# Altium PCB DataCollectionV1.0（18-7-31）.PcbDoc (part 1 of 2)
Units mm, origin at the board's own origin, x right, y up, seen from the top; angles counter-clockwise.
Board outline 100 x 91.53 mm, 4 copper layers (Top Layer, GND, VCC, Bottom Layer); 127 components, 107 nets, 701 pads, 38 vias.
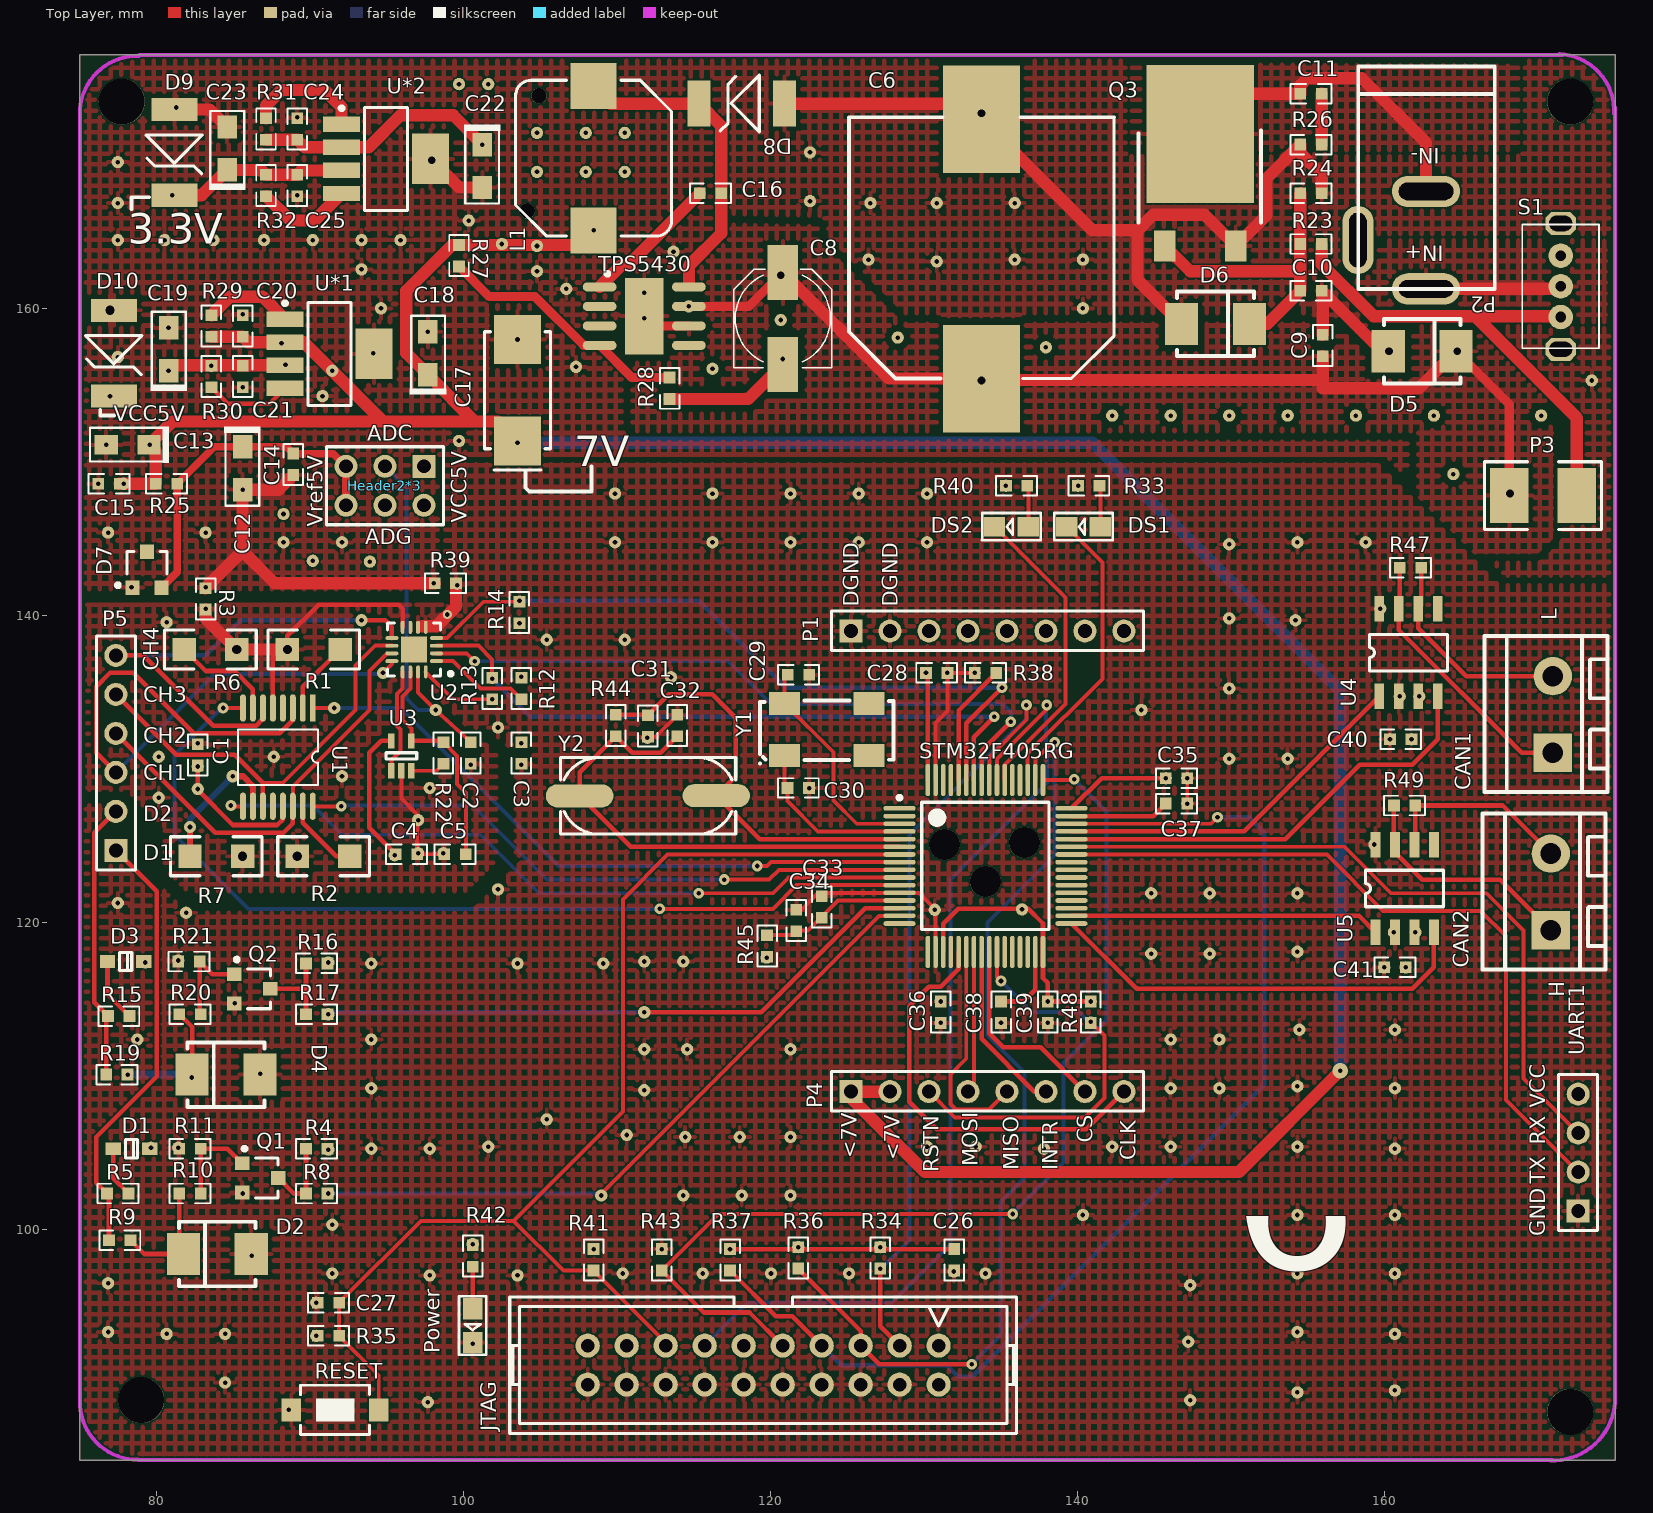
[diagram p0: Top Layer view]
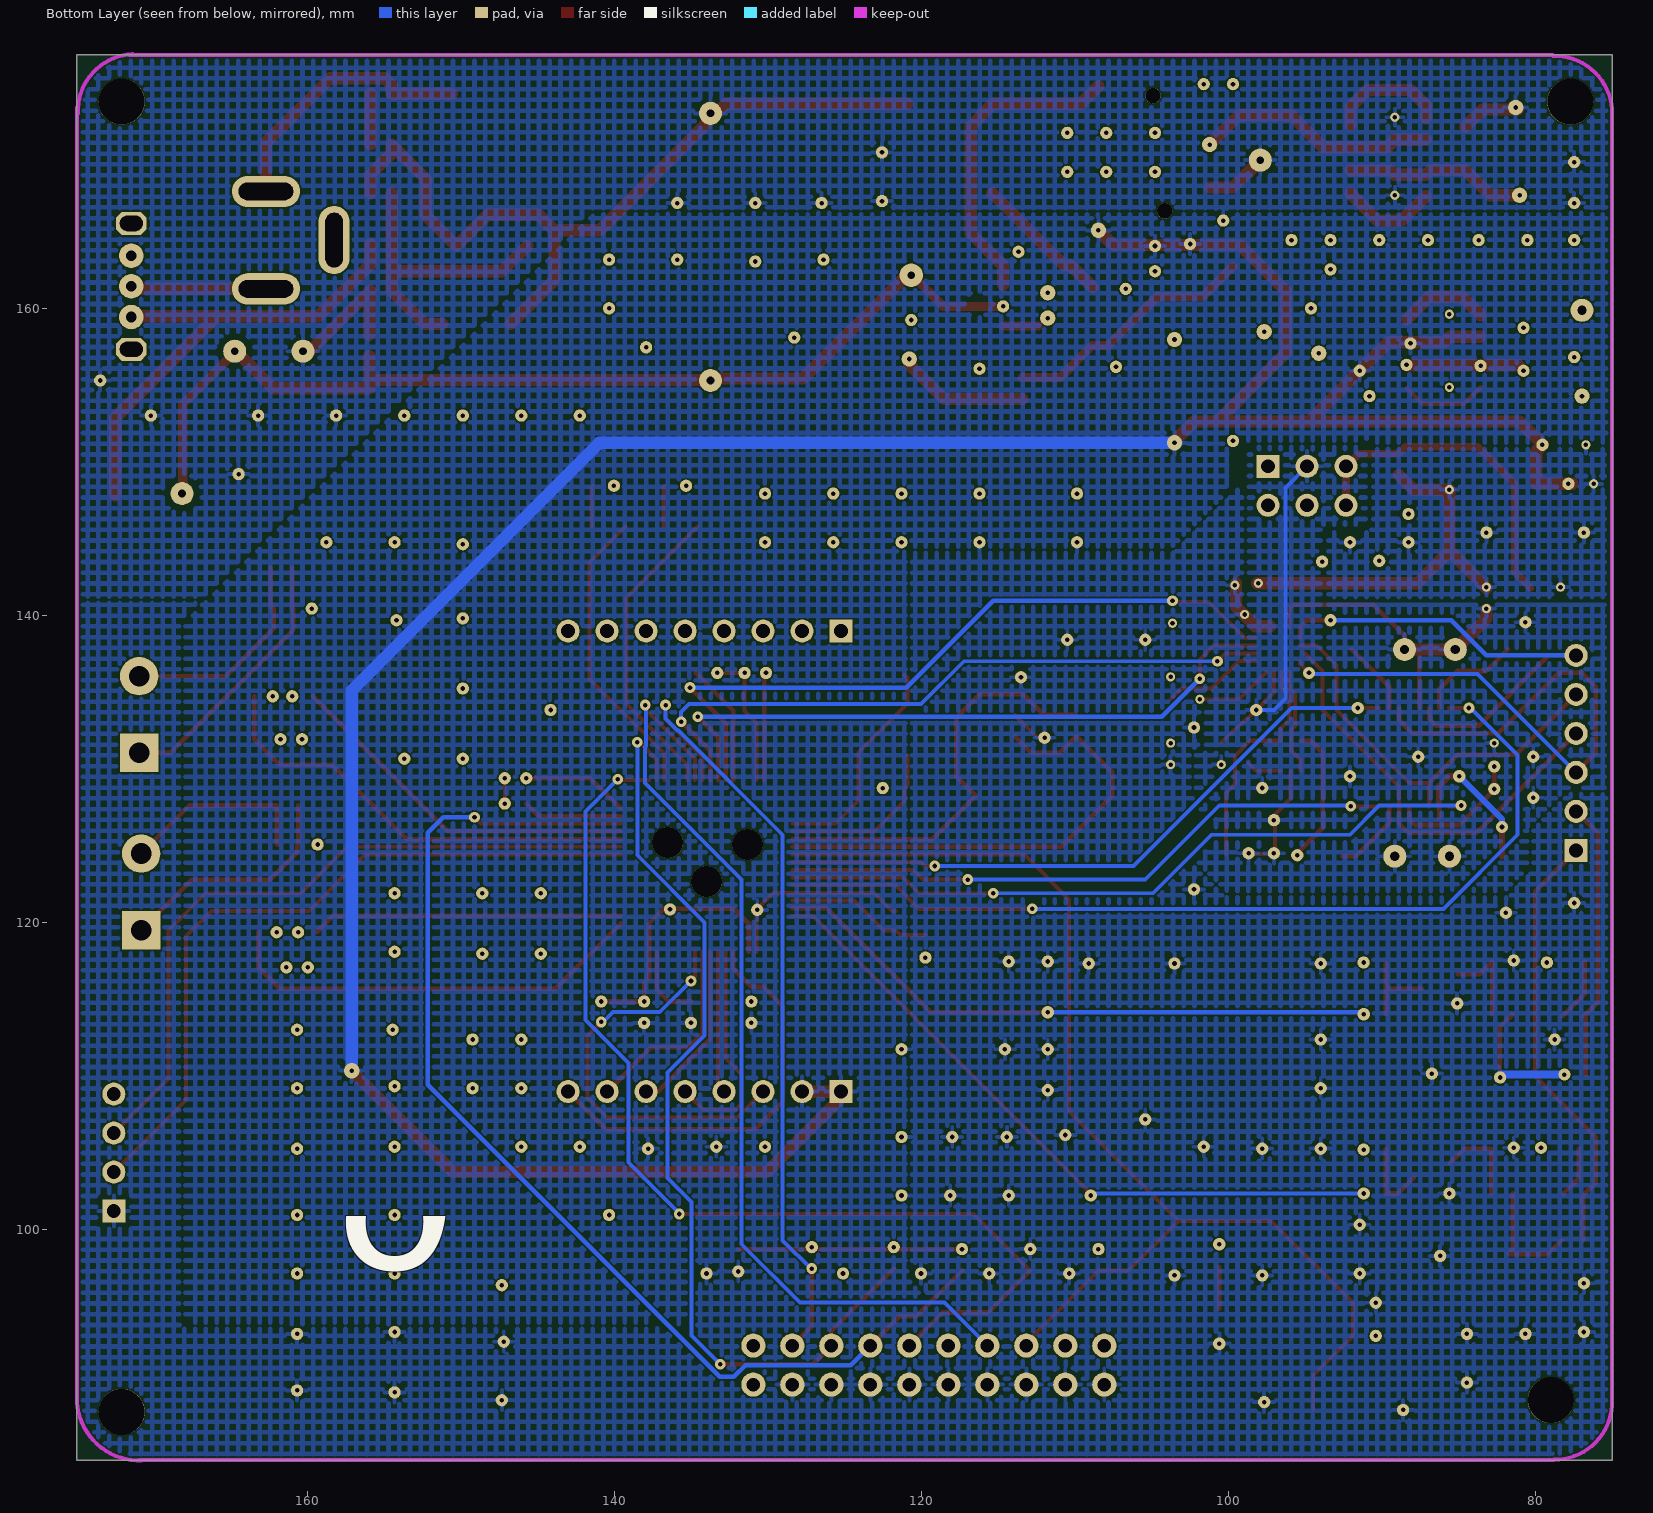
[diagram p1: Bottom Layer view, seen from below]
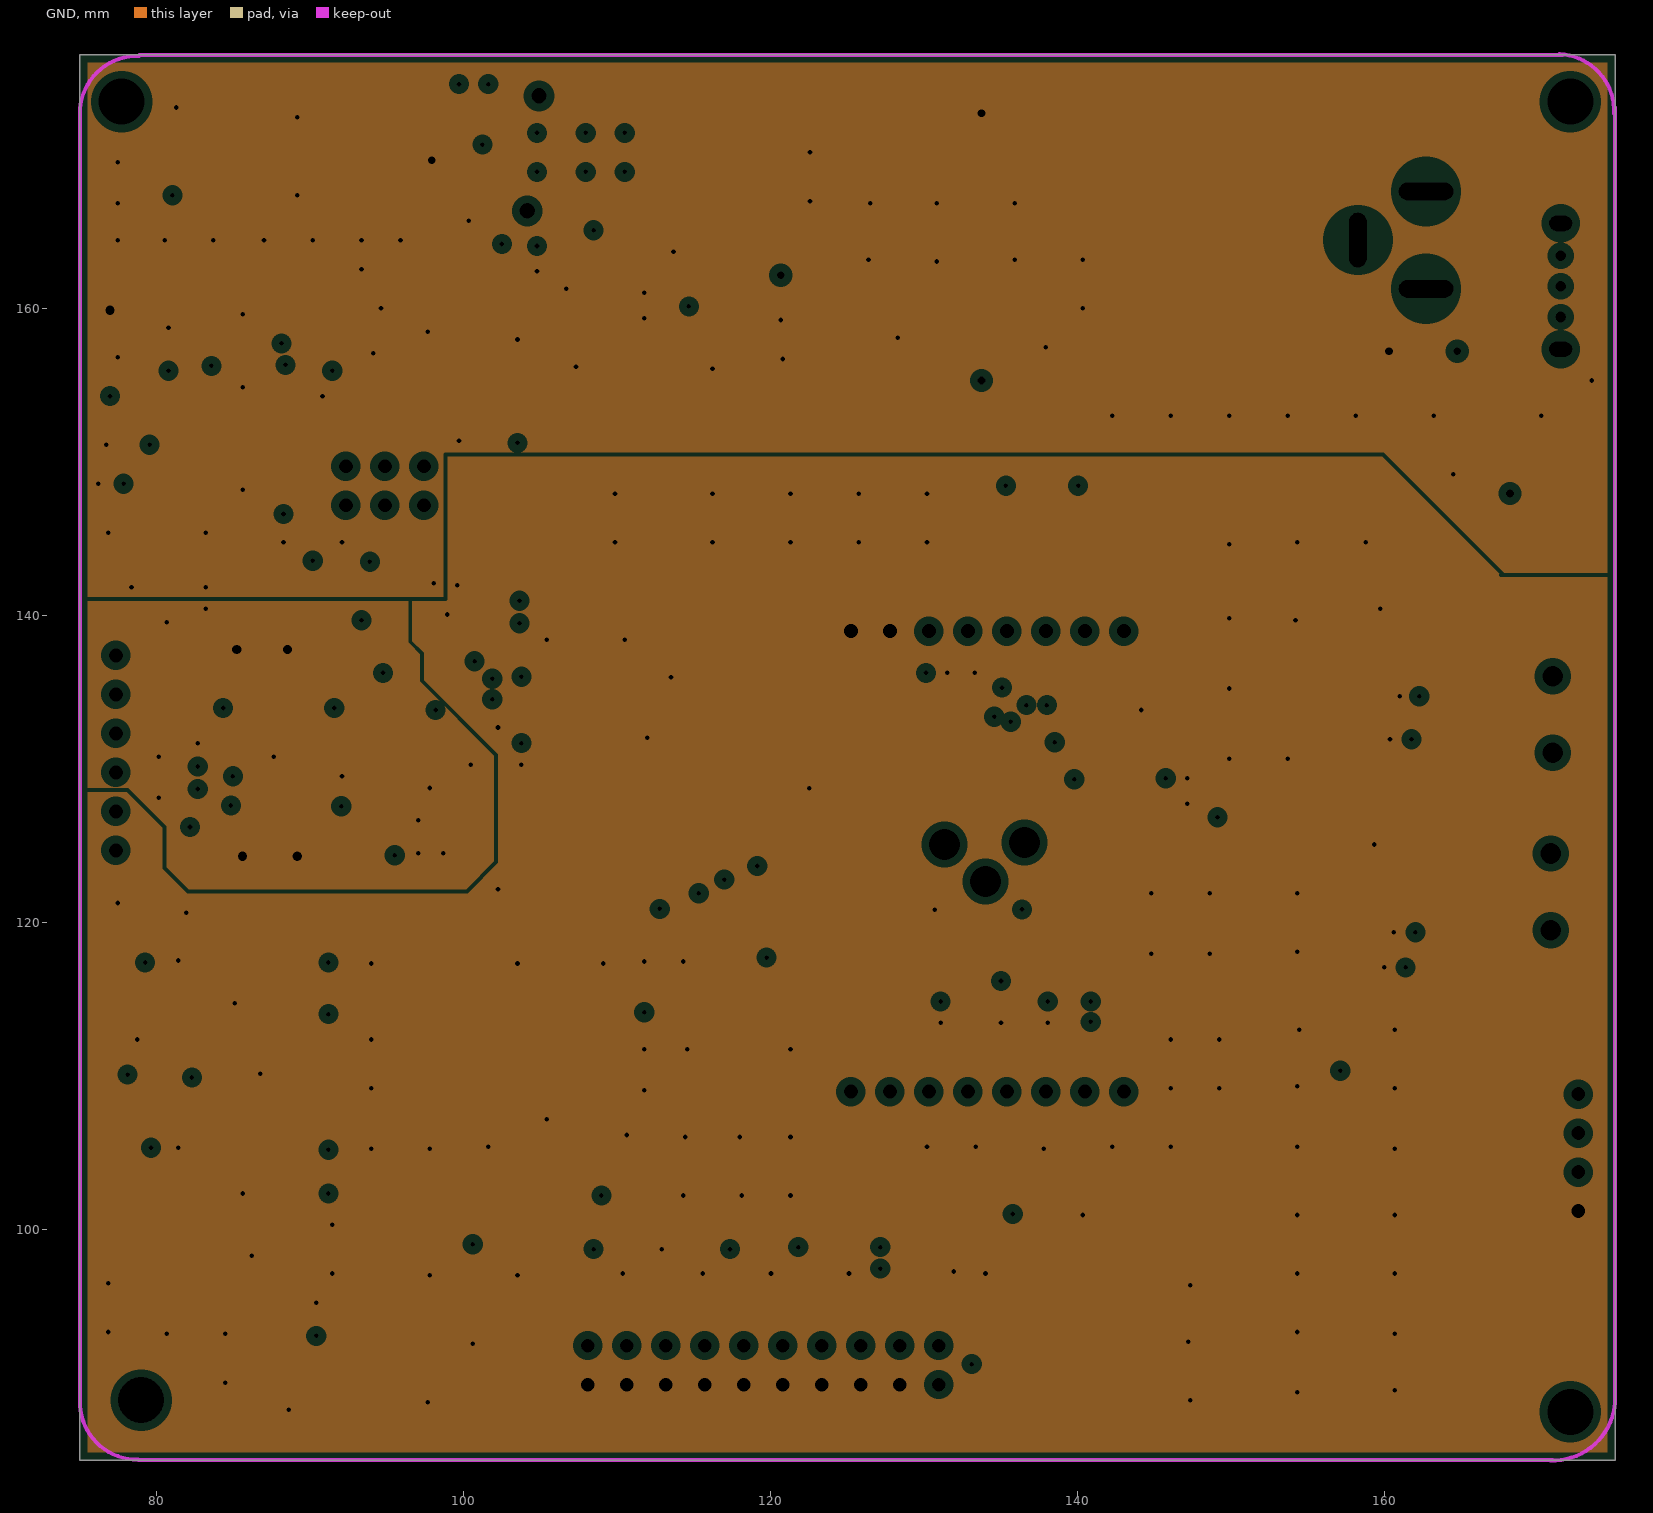
[diagram p2: GND, clearances drawn from the general rule]
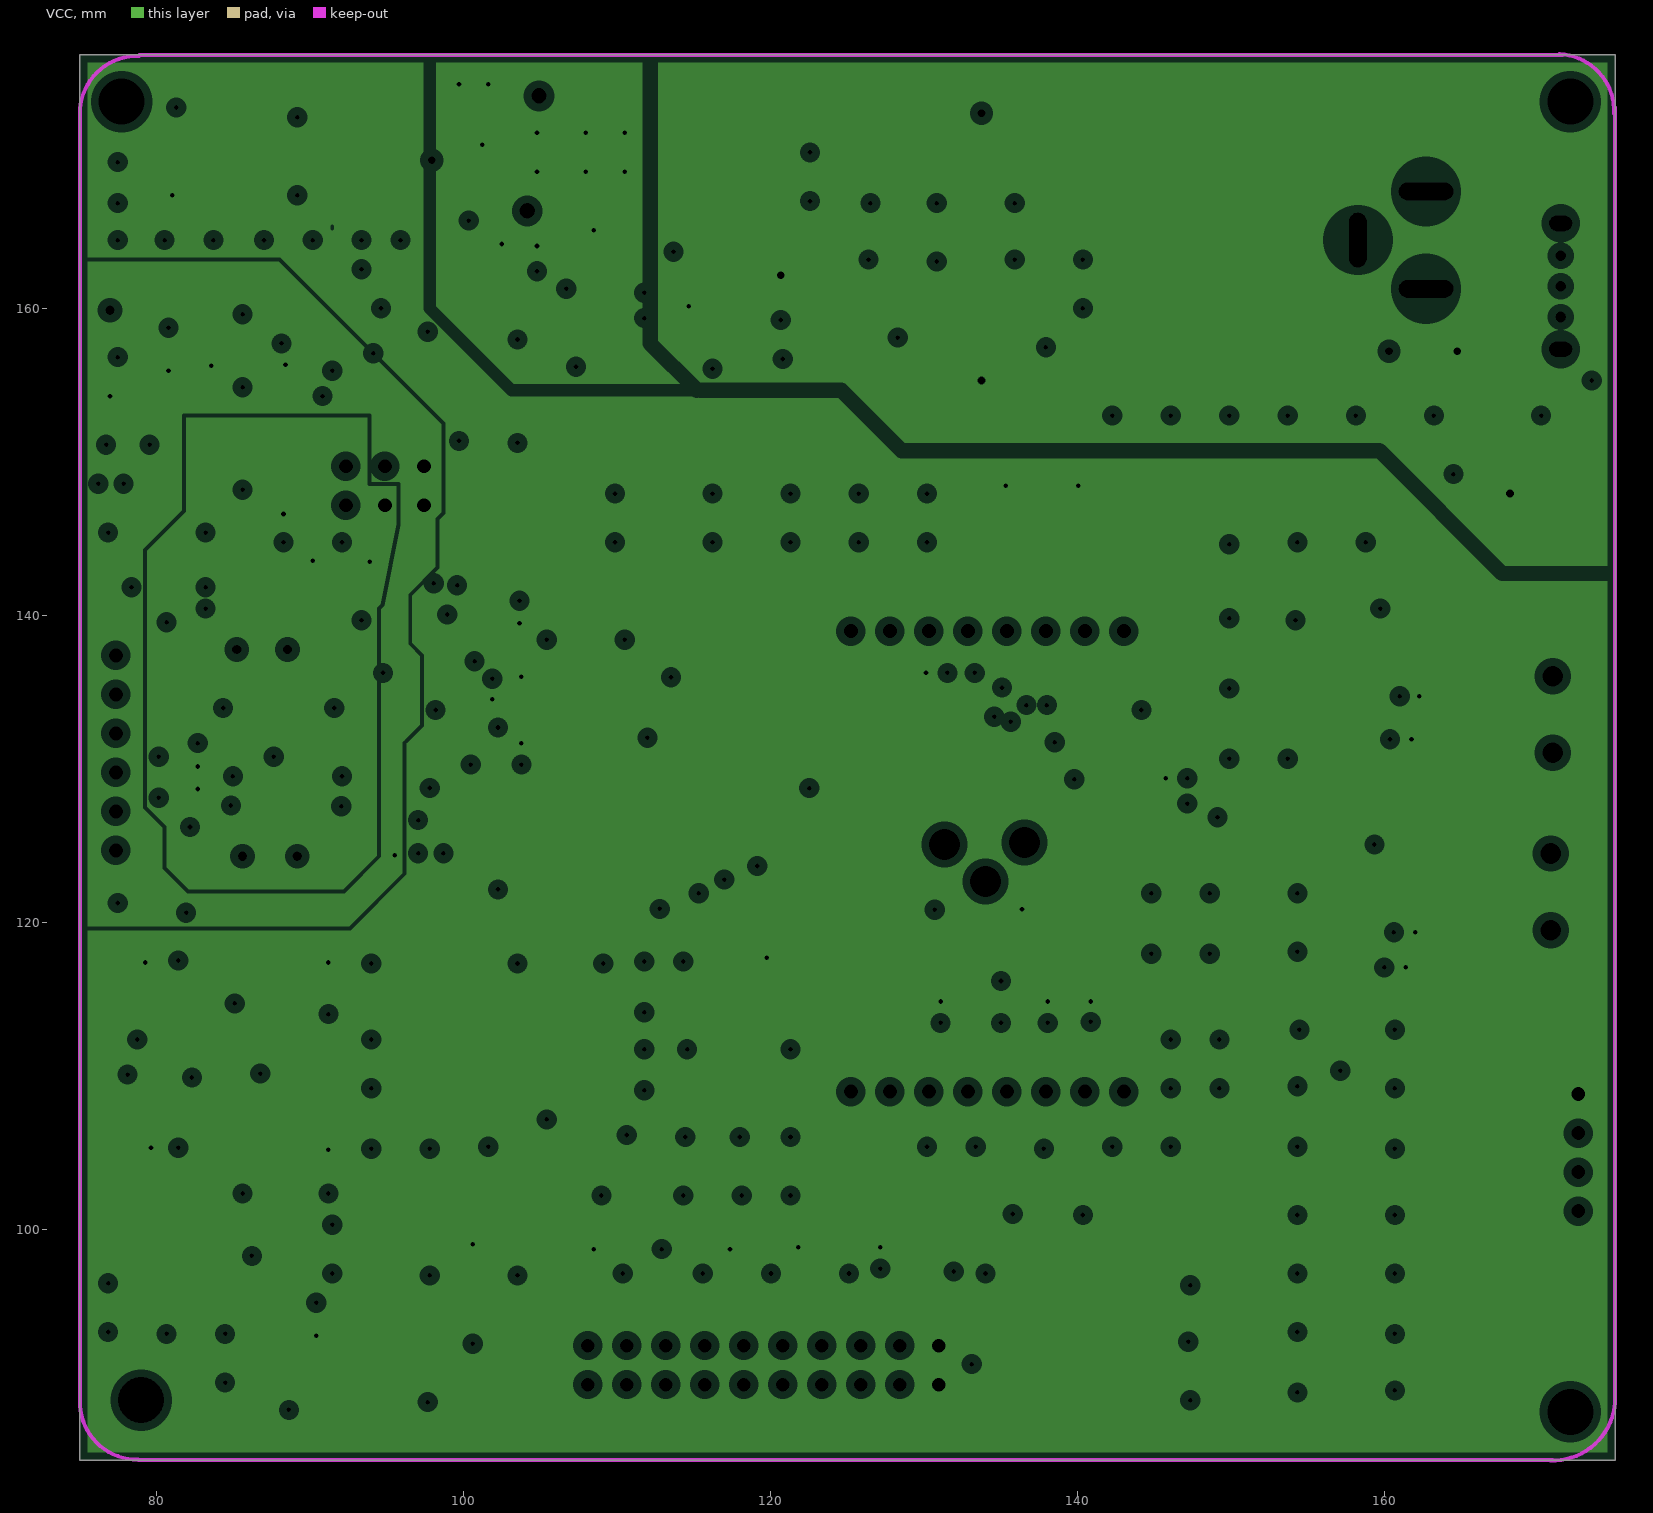
[diagram p3: VCC, clearances drawn from the general rule]
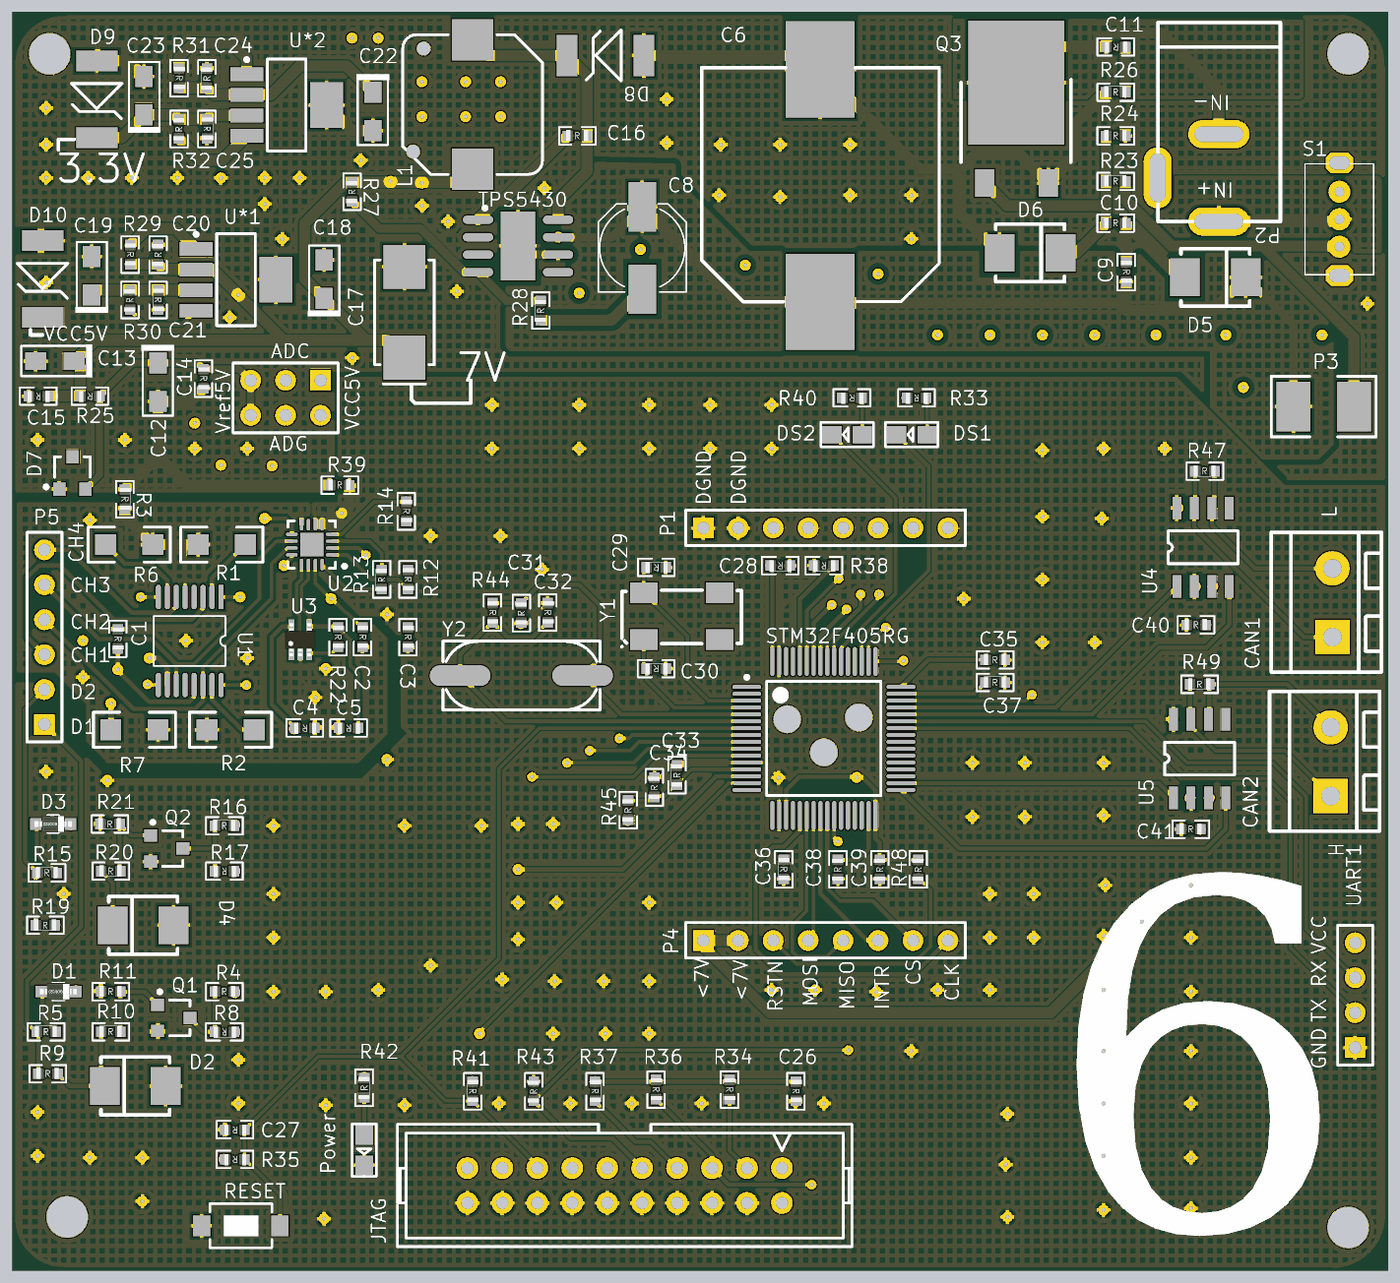
[diagram p5: 3D render of the assembled board from above, using the file's embedded part models]

## Layer stack, top to bottom
Top Layer: signal copper 0.0356
Dielectric: core 0.32, FR-4, Dk 4.8
GND: plane copper 0.0356, net (Multiple Nets)
Dielectric: prepreg 0.32, FR-4, Dk 4.8
VCC: plane copper 0.0356, net (Multiple Nets)
Dielectric: core 0.32, FR-4, Dk 4.8
Bottom Layer: signal copper 0.0356

## Board outline
75,176.53 175,176.53 175,85 75,85

## Design rules (kind name [scope] priority, off if disabled: settings)
Clearance Poly [InNet('VCC24V') vs InNet('GND')] p1: gap=0.4
Clearance [All] p2: gap=0.1
HoleSize [All] p1: absolutevalues=TRUE maxlimit=5 minlimit=0.3 maxpercent=80.000 minpercent=20.000
MinimumSolderMaskSliver [All] p1: minsoldermaskwidth=0
PlaneClearance [All] p1: clearance=0.508
PlaneConnect [All] p1: planeconnectstyle=Relief reliefexpansion=0.508 reliefentries=4 reliefconductorwidth=0.254 reliefairgap=0.254
PolygonConnect [All] p1: connectstyle=Relief reliefconductorwidth=0.254 reliefentries=4 polygonreliefangle="90 Angle" airgapwidth=0.254
RoutingVias [All] p1: holewidth=0.3 width=1 viastyle="Through Hole" minholewidth=0.3 minwidth=0.6 maxholewidth=0.8 maxwidth=3
SilkToSilkClearance [All] p1: silktosilkclearance=0
SilkToSolderMaskClearance [IsPad] p1: minsilkscreentomaskgap=0 clearancetoexposedcopper=TRUE
SolderMaskExpansion [All] p1: expansion=0.102
Width GND [(InNet('AGND') OR InNet('GND') OR InNet('NetP2_1'))] p1: maxlimit=0.8 minlimit=0.254 preferedwidth=0.6
Width 5Vand3V [(InNet('ADCIN') OR InNet('AVDD_ADC') OR InNet('VCC3V3') OR InNet('VCC5V') OR InNet('VREF5V'))] p2: maxlimit=0.8 minlimit=0.254 preferedwidth=0.4
Width 7V [InNet('VCC7V')] p3: maxlimit=0.8 minlimit=0.254 preferedwidth=0.6
Width 24V [(InNet('NetC11_2') OR InNet('VCC24V'))] p4: maxlimit=0.8 minlimit=0.254 preferedwidth=0.8
Width [All] p5: maxlimit=0.8 minlimit=0.254 preferedwidth=0.254
22 further rules are at their usual default settings.

## Classes and differential pairs
component class rock: C26 C27 C28 C29 C30 C31 C32 C33 C34 C35 C36 C37 C38 C39 C40 C41 CAN1 CAN2 DS1 DS2 JTAG P1 P4 Power R33 R34 R35 R36 R37 R38 R40 R41 R42 R43 R44 R45 R47 R48 R49 RESET STM32F405RG U4 U5 UART1 Y1 Y2
component class Power: C6 C8 C9 C10 C11 C12 C13 C14 C15 C16 C17 C18 C19 C20 C21 C22 C23 C24 C25 D5 D6 D7 D8 D9 D10 L1 P2 P3 Q3 R3 R23 R24 R25 R26 R27 R28 R29 R30 R31 R32 R39 S1 TPS5430 U*1 U*2
component class ADC: C1 C2 C3 C4 C5 D1 D2 D3 D4 Header2*3 P5 Q1 Q2 R1 R2 R4 R5 R6 R7 R8 R9 R10 R11 R12 R13 R14 R15 R16 R17 R19 R20 R21 R22 U1 U2 U3

## Components (designator, comment, footprint, x,y, rotation, side; value= is the part's Value field where it differs from the comment)
C1 "0.1uF" 0603 82.677,130.937 r270 top
C2 "1uF" 0603 100.457,131.064 r270 top
C3 "1uF" 0603 103.759,131.064 r270 top
C4 "1uF" 0603 96.266,124.46 r180 top
C5 "2.2nF" 0603 99.441,124.46 r180 top
C6 "470uF" SMD16 125.222,155.448 r90 top
C8 "22uF" SMD6 120.777,162.433 r270 top
C9 "0.1uF" 0603 155.956,157.607 r270 top
C10 "0.1uF" 0603 155.194,161.163 r0 top
C11 "0.1uF" 0603 155.194,173.99 r180 top
C12 "Cap Pol3" CAP-3216 85.598,149.606 r270 top
C13 "Cap Pol3" CAP-3216 78.105,151.13 r180 top
C14 "0.1uF" 0603 88.9,149.86 r270 top
C15 "0.1uF" 0603 76.898,148.59 r180 top
C16 "0.01uF" 0603 116.078,167.513 r0 top
C17 "220uF" CAP-7343 103.505,154.686 r90 top
C18 "Cap Pol3" CAP-3216 97.663,157.099 r90 top
C19 "Cap Pol3" CAP-3216 80.772,157.353 r90 top
C20 "0.1uF" 0603 85.598,158.877 r90 top
C21 "0.1uF" 0603 85.598,155.575 r270 top
C22 "Cap Pol3" CAP-3216 101.219,169.291 r270 top
C23 "Cap Pol3" CAP-3216 84.582,170.434 r90 top
C24 "0.1uF" 0603 89.154,171.704 r90 top
C25 "0.1uF" 0603 89.154,168.021 r270 top
C26 "0.1uF" 0603 131.953,98.044 r270 top
C27 "0.1uF" 0603 91.186,95.25 r180 top
C28 "0.1uF" 0603 130.81,136.271 r180 top
C29 "6pF" 0603 121.8,136.144 r180 top
C30 "6pF" 0603 121.793,128.778 r180 top
C31 "20pF" 0603 112,132.814 r90 top
C32 "20pF" 0603 113.919,132.842 r270 top
C33 "104" 0603 123.317,121.031 r90 top
C34 "104" 0603 121.666,120.142 r90 top
C35 "0.1uF" 0603 146.431,129.413 r0 top
C36 "104" 0603 131.064,114.173 r270 top
C37 "2.2uF" 0603 146.431,127.762 r0 top
C38 "2.2uF" 0603 135.001,114.173 r90 top
C39 "104" 0603 138.049,114.173 r90 top
C40 "0.1uF" 0603 161.036,131.953 r0 top
C41 "0.1uF" 0603 160.655,117.094 r0 top
CAN1 "CAN1" HEAD2L-0.8 170.942,131.064 r90 top
CAN2 "CAN2" HEAD2L-0.8 170.815,119.507 r90 top
D1 "LRB551V-30T1G" SOD-323 78.359,105.283 r180 top
D2 "SMBJ 6.5CA" DO-214AA 86.233,98.552 r0 top
D3 "LRB551V-30T1G" SOD-323 77.978,117.475 r180 top
D4 "SMBJ 6.5CA" DO-214AA 86.804,110.236 r0 top
D5 "SMBJ 24CA" DO-214AA 160.147,157.099 r180 top
D6 "SMBJ 6CA" DO-214AA 146.685,158.877 r180 top
D7 "LM4050AIM3" SOT-23 79.375,143.002 r0 top
D8 "B340A" SMBJ 118.237,173.355 r180 top
D9 "SMBJ3.3A" SMBJ 81.153,170.307 r270 top
D10 "SMBJ5A" SMBJ 77.216,157.226 r270 top
DS1 "LED1" SMDLED 141.478,145.796 r180 top
DS2 "LED2" SMDLED 136.779,145.796 r180 top
Header2*3 "Header2*3CHOOSE" HDR2X3_2 97.409,149.733 r180 top
JTAG "JTAG" JTAG_20 119.507,91.186 r180 top
L1 "Inductor" L-SMD-10 108.458,169.799 r270 top
P1 "Header 8" HDR8X1_A1 125.222,139 r0 top
P2 "POWER_JACK" DC_IN 162.687,161.29 r90 top
P3 "PTC" 1812 170.307,147.828 r180 top
P4 "Header 8" HDR8X1_A1 125.222,109 r0 top
P5 "Header 6" HDR6X1_A 77.343,124.714 r90 top
Power "LED3" SMDLED 100.584,94.869 r270 top
Q1 "9013" SOT-23 86.741,103.378 r270 top
Q2 "9013" SOT-23 86.233,115.697 r270 top
Q3 "RFD16N05LSM" TO-252AA 145.669,164.084 r0 top
R1 "240R" 1206 91.948,137.795 r180 top
R2 "240" 1206 89.154,124.333 r0 top
R3 "0R" 0603 83.185,141.097 r270 top
R4 "1K" 0603 90.424,105.283 r0 top
R5 "1K" 0603 77.47,102.362 r0 top
R6 "240R" 1206 81.788,137.795 r0 top
R7 "240" 1206 85.598,124.333 r180 top
R8 "0R" 0603 90.424,102.362 r180 top
R9 "1K" 0603 77.597,99.314 r0 top
R10 "1K" 0603 82.169,102.362 r0 top
R11 "10K" 0603 82.169,105.283 r0 top
R12 "10K" 0603 103.759,135.255 r270 top
R13 "3K" 0603 101.854,135.255 r90 top
R14 "3K" 0603 103.632,140.208 r270 top
R15 "1K" 0603 77.534,113.919 r0 top
R16 "1K" 0603 90.424,117.348 r0 top
R17 "0R" 0603 90.424,114.046 r180 top
R19 "1K" 0603 77.406,110.109 r0 top
R20 "1K" 0603 82.169,114.046 r0 top
R21 "10K" 0603 82.105,117.475 r0 top
R22 "499R" 0603 98.679,131.064 r270 top
R23 "18K" 0603 155.194,164.211 r0 top
R24 "6K" 0603 155.194,167.513 r0 top
R25 "1K" 0603 80.645,148.59 r180 top
R26 "1K" 0603 155.194,170.688 r0 top
R27 "10K" 0603 99.695,163.449 r90 top
R28 "1.75K" 0603 113.411,154.813 r90 top
R29 "Res1" 0603 83.566,158.877 r270 top
R30 "Res1" 0603 83.566,155.575 r90 top
R31 "Res1" 0603 87.122,171.704 r270 top
R32 "Res1" 0603 87.122,168.021 r90 top
R33 "1K" 0603 140.716,148.463 r180 top
R34 "10k" 0603 127.127,98.171 r270 top
R35 "10K" 0603 91.186,93.091 r180 top
R36 "10k" 0603 121.793,98.171 r270 top
R37 "10k" 0603 117.348,98.044 r270 top
R38 "10K" 0603 133.985,136.271 r180 top
R39 "0R" 0603 98.806,142.113 r0 top
R40 "1K" 0603 136.017,148.463 r180 top
R41 "10k" 0603 108.458,98.044 r270 top
R42 "1K" 0603 100.584,98.298 r90 top
R43 "10k" 0603 112.903,98.044 r90 top
R44 "10M" 0603 109.9,132.842 r270 top
R45 "10R" 0603 119.761,118.491 r90 top
R47 "120R" 0603 161.671,143.129 r0 top
R48 "10K" 0603 140.843,114.173 r90 top
R49 "120R" 0603 161.29,127.635 r0 top
RESET "SW-PB" SW_PB2_A2 91.567,88.265 r270 top
S1 "SWITCH" Switch_2mm 171.45,157.353 r0 top
STM32F405RG "STM" LQFP-64 133.985,123.698 r0 top
TPS5430 "TPS" NSO8_TP4056 111.76,159.512 r0 top
U1 "ADG711" TSSOP16 89.916,133.604 r270 top
U2 "ADS7924" WQFN16 96.774,137.795 r180 top
U3 "OPA313" SC70-5 95.25,129.794 r270 top
U4 "TJA1050/SN65HVD232DR" SOP-8 159.639,134.747 r90 top
U5 "TJA1050/SN65HVD232DR" SOP-8 159.385,119.38 r90 top
U*1 "LP3871-5V" SOT-223-5 88.646,159.258 r0 top
U*2 "LP3871-3V3" SOT-223-5 92.329,171.958 r0 top
UART1 "Header 4" HDR4X1_A 172.593,101.219 r90 top
Y1 "MC306" XTAL_8x3.8 123.698,132.588 r180 top
Y2 "8MHz" X-SM49 112,128.27 r0 top

## Footprints (in the part's own frame and the unit in brackets; to place one, negate y for a bottom-side part, rotate by r counter-clockwise, add the part's x,y. Pads: shape width x height; smd on the part's side, far side on the other; paste and mask are expansions set on the pad)
0603 [mil]
  rect 30x30 smd: 1(-27.5,0) 2(27.5,0)
  silkscreen extent -53,-25 53,25, body extent -32,-15 31,17, height 21
1206 [mil]
  rect 60x60 smd: 1(0,0) 2(135,0)
  silkscreen extent -50,-50 185,50
1812 [mm] "保险丝"
  rect 2.5x3.6 smd: 1(-2.2,0) 2(2.2,0)
  silkscreen extent -3.81,-2.2 3.81,2.2, body extent -2.54,-1.65 2.67,1.65, height 1.2
CAP-3216 [mil] "钽电容"
  rect 60x50 smd: 1(-55,0) 2(55,0)
  silkscreen extent -106,-48 96,46
CAP-7343 [mm] "钽电容"
  rect 3.2x3.05 smd: 1(-3.302,0) 2(3.302,0)
  silkscreen extent -5.21,-2.16 3.81,2.16, body extent -3.68,-1.91 3.68,1.91, height 2.95
DC_IN [mil]
  oval 80x175 hole 45 slot 140 at 90 deg: 1(0,0) 2(250,0)
  oval 175x80 hole 45 slot 140 at 0 deg: 3(125,175)
  silkscreen extent 0,-176 570,174
DO-214AA [mil]
  rect 85x107.99 smd: 1(-2.99,-5) 2(-177.01,-5)
  silkscreen extent -188,-88 8,78
HDR2X3_2 [mm]
  rect 1.5x1.5 hole 0.9: 1(0,0)
  round 1.5 hole 0.9: 2(0,2.54) 3(2.54,0) 4(2.54,2.54) 5(5.08,0) 6(5.08,2.54)
  silkscreen extent -1.27,-1.27 6.35,3.81
HDR4X1_A [mm] "Connector; Header; 4 Position"
  rect 1.5x1.5 hole 0.9: 1(0,0)
  round 1.5 hole 0.9: 2(2.54,0) 3(5.08,0) 4(7.62,0)
  silkscreen extent -1.27,-1.27 8.89,1.27
HDR6X1_A [mm] "Connector; Header; 4 Position"
  rect 1.5x1.5 hole 0.9: 1(0,0)
  round 1.5 hole 0.9: 2(2.54,0) 3(5.08,0) 4(7.62,0) 5(10.16,0) 6(12.7,0)
  silkscreen extent -1.27,-1.27 13.97,1.27
HDR8X1_A1 [mm] "Connector; Header; 8x1 Position"
  rect 1.5x1.5 hole 0.9: 1(0,0)
  round 1.5 hole 0.9: 2(2.54,0) 3(5.08,0) 4(7.62,0) 5(10.16,0) 6(12.7,0) 7(15.24,0) 8(17.78,0)
  silkscreen extent -1.27,-1.27 19.05,1.3
HEAD2L-0.8 [mm]
  rect 2.5x2.5 hole 1.35: 1(0,0)
  round 2.5 hole 1.35: 2(5,0)
  silkscreen extent -2.54,-3.56 7.62,4.45
JTAG_20 [mil]
  round 62 hole 35: 1(-450,-50) 2(-450,50) 3(-350,-50) 4(-350,50) 5(-250,-50) 6(-250,50) 7(-150,-50) 8(-150,50) 9(-50,-50) 10(-50,50) 11(50,-50) 12(50,50) 13(150,-50) 14(150,50) 15(250,-50) 16(250,50) 17(350,-50) 18(350,50) 19(450,-50) 20(450,50)
  silkscreen extent -650,-175 650,175
L-SMD-10 [mm] "贴片电感10*10"
  rect 3x3 smd: 1(-4.699,0) 2(4.699,0)
  silkscreen extent -5.08,-5.08 5.08,5.08, body extent -5.08,-5.08 5.08,5.08, height 4
LQFP-64 [mm] "LQFP64"
  oval 2.1x0.3 smd: 1(-5.6,3.75) 2(-5.6,3.25) 3(-5.6,2.75) 4(-5.6,2.25) 5(-5.6,1.75) 6(-5.6,1.25) 7(-5.6,0.75) 8(-5.6,0.25) 9(-5.6,-0.25) 10(-5.6,-0.75) 11(-5.6,-1.25) 12(-5.6,-1.75) 13(-5.6,-2.25) 14(-5.6,-2.75) 15(-5.6,-3.25) 16(-5.6,-3.75) 33(5.6,-3.75) 34(5.6,-3.25) 35(5.6,-2.75) 36(5.6,-2.25) 37(5.6,-1.75) 38(5.6,-1.25) 39(5.6,-0.75) 40(5.6,-0.25) 41(5.6,0.25) 42(5.6,0.75) 43(5.6,1.25) 44(5.6,1.75) 45(5.6,2.25) 46(5.6,2.75) 47(5.6,3.25) 48(5.6,3.75)
  oval 0.3x2.1 smd: 17(-3.75,-5.6) 18(-3.25,-5.6) 19(-2.75,-5.6) 20(-2.25,-5.6) 21(-1.75,-5.6) 22(-1.25,-5.6) 23(-0.75,-5.6) 24(-0.25,-5.6) 25(0.25,-5.6) 26(0.75,-5.6) 27(1.25,-5.6) 28(1.75,-5.6) 29(2.25,-5.6) 30(2.75,-5.6) 31(3.25,-5.6) 32(3.75,-5.6) 49(3.75,5.6) 50(3.25,5.6) 51(2.75,5.6) 52(2.25,5.6) 53(1.75,5.6) 54(1.25,5.6) 55(0.75,5.6) 56(0.25,5.6) 57(-0.25,5.6) 58(-0.75,5.6) 59(-1.25,5.6) 60(-1.75,5.6) 61(-2.25,5.6) 62(-2.75,5.6) 63(-3.25,5.6) 64(-3.75,5.6)
  silkscreen extent -5.72,-4.15 4.15,4.57, body extent -5,-5 5,5, height 1.6
NSO8_TP4056 [mm] "SOIC-max660"
  oval 2.2x0.6 smd: 1(-2.908,1.905) 2(-2.908,0.635) 3(-2.908,-0.635) 4(-2.908,-1.905) 5(2.908,-1.905) 6(2.908,-0.635) 7(2.908,0.635) 8(2.908,1.905)
  rect 2.5x5 smd: 9(0,0)
  silkscreen extent -2.52,2.63 -2.27,2.88
SC70-5 [mm]
  rect 1x0.42 smd mask+0.051: 1(-0.108,0.04) 2(-0.108,0.69) 3(-0.108,1.34) 4(-2.048,1.34) 5(-2.048,0.04)
  silkscreen extent -1.28,-0.31 -0.88,1.69, body extent -2.28,-0.41 0.12,1.79, height 1.1
SMBJ [mm]
  rect 1.5x3 smd: 1(-2.667,0) 2(2.921,0)
  silkscreen extent -1.02,-1.85 1.52,1.83
SMD6 [mm]
  rect 3.6x2 smd: 1(0.071,0.009) 2(6.071,0.009)
  silkscreen extent -0.13,-3.19 6.27,3.21
SMD16 [mm]
  rect 7x5 smd: 1(0,-8.5) 2(16.891,-8.5)
  silkscreen extent 0.01,-17.14 17.02,0.13, body extent 0,-17.15 17.02,0.25, height 10.9
SMDLED [mm] "贴片LED"
  rect 1.4x1.27 smd: 1(0.001,-0.002) 2(2.211,-0.002)
  silkscreen extent -0.8,-0.89 3.01,0.89
SOD-323 [mm]
  rect 1x0.83 smd: 1(1.18,0) 2(-1.18,0)
  silkscreen extent -0.4,-0.6 0.4,0.6, body extent -1.35,-0.62 1.35,0.63, height 1.1
SOP-8 [mil]
  rect 65x25 smd: 1(0,0) 2(0,-50) 3(0,-100) 4(0,-150) 5(224.41,-150) 6(224.41,-100) 7(224.41,-50) 8(224.41,0)
  silkscreen extent 65,-175 159,25
SOT-23 [mm]
  rect 0.9x0.95 smd: 1(-0.95,-1.175) 2(0.95,-1.175) 3(0,1.175)
  silkscreen extent -2.03,-1.14 1.3,1.18
SOT-223-5 [mm]
  rect 2.4x1 smd: 1(-0.285,0.047) 2(-0.285,-1.453) 3(-0.285,-2.953) 4(-0.285,-4.453)
  rect 2.4x3.3 smd: 5(5.515,-2.203)
  silkscreen extent -0.41,-5.55 4.02,1.22, body extent 0.77,-5.55 4.47,1.15, height 1.8
SW_PB2_A2 [mm] "3*4mm"
  rect 1.5x1.25 smd: 1(0,2.9) 2(0,-2.8)
  silkscreen extent -1.6,-2.2 1.6,2.3, body extent -0.76,-1.14 0.76,1.27, height 1.2
Switch_2mm [mm]
  round 1.6 hole 0.7: 1(0,2.1) 2(0,4.1) 3(0,6.1)
  oct 2x1.5 hole 1 slot 1.5 at 0 deg: 4(0,8.2) 5(0,0)
  silkscreen extent -2.5,0.07 2.5,8.13
TO-252AA [mm]
  rect 1.4x2 smd: 1(0,0) 2(4.623,0)
  rect 7x9 smd: 3(2.3,7.3)
  silkscreen extent -1.72,1.52 6.26,7.51
TSSOP16 [mil]
  rect 70x15 smd: 1(-15,10)
  oval 70x15 smd: 2(-15,-15.59) 3(-15,-41.18) 4(-15,-66.77) 5(-15,-92.36) 6(-15,-117.95) 7(-15,-143.54) 8(-15,-169.13) 9(236.97,-169.13) 10(236.97,-143.54) 11(236.97,-117.95) 12(236.97,-92.36) 13(236.97,-66.77) 14(236.97,-41.18) 15(236.97,-15.59) 16(236.97,10)
  silkscreen extent 40,-182 182,23
WQFN16 [mm] "QFN, 16-Leads, Body 3.00x3.00mm, Pitch 0.50mm, Thermal Pad 1.70x1.70mm, IPC Medium Density"
  oval 0.85x0.25 smd: 1(-1.45,0.75) 2(-1.45,0.25) 3(-1.45,-0.25) 4(-1.45,-0.75) 9(1.45,-0.75) 10(1.45,-0.25) 11(1.45,0.25) 12(1.45,0.75)
  oval 0.25x0.85 smd: 5(-0.75,-1.45) 6(-0.25,-1.45) 7(0.25,-1.45) 8(0.75,-1.45) 13(0.75,1.45) 14(0.25,1.45) 15(-0.25,1.45) 16(-0.75,1.45)
  rect 1.7x1.7 smd: 17(0,0)
  silkscreen extent -2.5,-1.73 1.73,1.73, body extent -1.58,-1.58 1.58,1.58, height 0.8
X-SM49 [mm]
  oval 4.4x1.5 smd: 1(4.45,0.004) 2(-4.45,-0.004)
  silkscreen extent -5.7,-2.5 5.72,2.5
XTAL_8x3.8 [mm] "四脚晶振"
  rect 2x1.5 smd: 1(2.8,1.7) 2(-2.7,1.7) 3(-2.7,-1.7) 4(2.8,-1.7)
  silkscreen extent -4.3,-1.9 4.4,2.23

## Part data
C1 C2 C3 C4 C5 C14 C15 C16 C20 C21 C24 C25 C26 C27 C28 C29 C30 C31 C32 C33 C34 C35 C36 C37 C38 C39 C40 C41: library part C
C6: library part CAP+_100uF, "Cap,100uF,DIP"
C8: library part CAP+_100uF, "钽电容 SMD 6.3*5.5  50V"
C9 C10 C11: library part C_0.1uF, "Cap,0.1uF,104"
C12 C13 C18 C19 C22 C23: "Polarized Capacitor (Surface Mount)"
C17: library part CAP, "钽电容/220uF(227) ±10% 16V"
CAN1 CAN2: library part HEAD2
D1 D3: library part "D_DIODE LRB", "LRB551V-30T1G  20V  0.5A 肖特基二极管"
D2 D4: "TVS,SMBJ 6.5CA,600W SMD Transient Voltage Suppressor Diodes,"
D5 D6: library part "SMBJ 6.5CA", "TVS,SMBJ 6.5CA,600W SMD Transient Voltage Suppressor Diodes,"
D7: library part D
D8 D9 D10: library part SMBJ, "TVS"
DS1 Power: library part LED2, "Typical RED, GREEN, YELLOW, AMBER GaAs LED"
DS2: "Typical RED, GREEN, YELLOW, AMBER GaAs LED"
Header2*3: "2*3"
L1: "电感"
P1 P4: "Header, 8-Pin"
P5 UART1: "接插件"
Q1 Q2: library part L2SC4617RT1G, "L2SC4617RT1G"
Q3: library part IGBT-N, "Insulated Gate Bipolar Transistor (N-Channel)"
R1 R2 R6 R7 R8 R13 R14 R17 R22 R23 R24 R25 R26 R27 R28 R33 R34 R36 R37 R38 R40 R41 R42 R43 R44 R45 R47 R48 R49: library part R
R3 R4 R5 R9 R10 R11 R12 R15 R16 R19 R20 R21 R39: library part R_1K, "Res,1K,0603"
R29 R30 R31 R32: "贴片电阻"
R35: library part Res1, "贴片电阻"
RESET: "微动开关"
STM32F405RG: library part STM32F405RG, "STM32F405RG_64Pins"
TPS5430: library part TPS5430, "降压开关电源芯片"
U4 U5: library part SN65HVD230D
U*1: library part LP3871, "LDO电源芯片5V"
U*2: library part LP3871, "LDO电源芯片3V3"
Y1: library part XTAL_8x3.8, "贴片晶振MC306"
Y2: library part XTAL, "Crystal Oscillator"

## Free pads (board coordinates)
  round 3 hole 3: 0(77.724,173.482) 0(78.994,88.9) 0(172.085,88.138) 0(172.085,173.482)
  round 0.8 hole 0.3: 0(114.668,160.147) 1(79.248,117.411) 1(79.629,105.346) 1(81.407,105.346) 1(81.407,117.538) 1(82.296,109.918) 1(82.677,128.714) 1(82.677,130.175) 1(85.09,114.745) 1(86.741,110.172) 1(88.265,146.621) 1(90.17,143.573) 1(91.186,105.219) 1(91.186,117.411) 1(93.888,143.52) 1(95.504,124.396) 1(97.028,124.523) 1(97.028,126.682) 1(98.679,124.523) 1(108.458,98.742) 1(112.903,98.742) 1(117.348,98.742) 1(121.793,98.87) 1(127.127,98.87) 2(76.835,93.345) 2(76.835,96.52) 2(76.835,145.415) 2(77.47,121.285) 2(77.47,156.845) 2(77.47,164.465) 2(77.47,166.878) 2(77.47,169.545) 2(78.74,112.395) 2(80.137,128.143) 2(80.137,130.81) 2(80.518,164.465) 2(80.645,93.218) 2(80.645,139.573) 2(80.772,155.956) 2(80.772,158.75) 2(81.915,120.65) 2(83.185,145.415) 2(83.566,156.273) 2(83.693,164.465) 2(84.455,90.043) 2(84.455,93.218) 2(86.995,164.465) 2(87.63,130.81) 2(88.265,144.78) 2(88.392,156.337) 2(90.17,164.465) 2(90.805,154.305) 2(91.44,97.155) 2(91.44,100.33) 2(92.075,129.54) 2(92.075,144.78) 2(93.345,162.56) 2(93.345,164.465) 2(93.98,105.283) 2(93.98,109.22) 2(93.98,112.395) 2(93.98,117.348) 2(94.615,160.02) 2(95.885,164.465) 2(97.663,88.773) 2(97.79,97.028) 2(97.79,105.283) 2(97.79,128.778) 2(99.695,151.384) 2(99.695,174.625) 2(100.33,165.735) 2(101.6,105.41) 2(101.6,174.625) 2(102.235,122.174) 2(102.235,132.715) 2(102.489,164.211) 2(103.505,97.028) 2(103.505,117.348) 2(104.775,162.433) 2(104.775,164.084) 2(104.775,168.91) 2(104.775,171.45) 2(105.41,107.188) 2(105.41,138.43) 2(106.68,161.29) 2(107.315,156.21) 2(107.95,168.91) 2(107.95,171.45) 2(109.093,117.348) 2(109.855,144.78) 2(109.855,147.955) 2(110.363,97.155) 2(110.49,138.43) 2(110.49,168.91) 2(110.49,171.45) 2(110.617,106.172) 2(111.76,109.093) 2(111.76,111.76) 2(111.76,117.475) 2(113.665,163.703) 2(114.3,102.235) 2(114.3,117.475) 2(114.427,106.045) 2(114.554,111.76) 2(115.57,97.155) 2(116.205,144.78) 2(116.205,147.955) 2(116.205,156.083) 2(117.983,106.045) 2(118.11,102.235) 2(120.015,97.155) 2(120.65,159.258) 2(121.285,102.235) 2(121.285,106.045) 2(121.285,111.76) 2(121.285,144.78) 2(121.285,147.955) 2(122.555,167.005) 2(122.555,170.18) 2(125.095,97.155) 2(125.73,144.78) 2(125.73,147.955) 2(126.365,163.195) 2(126.492,166.878) 2(128.27,158.115) 2(130.175,105.41) 2(130.175,144.78) 2(130.175,147.955) 2(130.81,163.068) 2(130.81,166.878) 2(133.35,105.41) 2(133.985,97.155) 2(135.89,163.195) 2(135.89,166.878) 2(137.795,105.283) 2(137.922,157.48) 2(140.335,100.965) 2(140.335,160.02) 2(140.335,163.195) 2(142.24,105.41) 2(142.24,153.035) 2(144.145,133.858) 2(144.78,117.983) 2(144.78,121.92) 2(146.05,105.41) 2(146.05,109.22) 2(146.05,112.395) 2(146.05,153.035) 2(147.193,92.71) 2(147.32,88.9) 2(147.32,96.393) 2(148.59,117.983) 2(148.59,121.92) 2(149.225,109.22) 2(149.225,112.395) 2(149.86,130.683) 2(149.86,135.255) 2(149.86,139.827) 2(149.86,144.653) 2(149.86,153.035) 2(153.67,130.683) 2(153.67,153.035) 2(154.178,139.7) 2(154.305,89.408) 2(154.305,93.345) 2(154.305,97.155) 2(154.305,100.965) 2(154.305,105.41) 2(154.305,109.347) 2(154.305,118.11) 2(154.305,121.92) 2(154.305,144.78) 2(154.432,113.03) 2(158.115,153.035) 2(158.75,144.78) 2(160.655,89.535) 2(160.655,93.218) 2(160.655,97.155) 2(160.655,100.965) 2(160.655,105.283) 2(160.655,109.22) 2(160.655,113.03) 2(163.195,153.035) 2(164.465,149.225) 2(170.18,153.035) 2(173.482,155.321) 3(77.845,148.59) 3(79.54,151.13) 3(88.132,157.734) 3(91.44,155.956) 5(85.598,102.362) 5(86.201,98.298) 5(88.614,88.265) 5(90.392,93.091) 5(90.392,95.25) 5(111.968,132.052) 5(113.506,135.989) 5(119.729,117.729) 5(122.509,128.772) 5(131.921,97.282) 6(130.112,136.271) 6(131.508,136.271) 6(133.286,136.271) 6(135.319,148.463) 6(140.017,148.463) 6(145.732,129.413) 6(147.13,127.762) 6(147.13,129.413) 6(159.321,125.095) 6(159.702,140.462) 6(159.957,117.094) 6(160.338,131.953) 6(160.591,119.38) 6(160.972,134.747) 6(161.353,117.094) 6(161.734,131.953) 6(161.988,119.38) 6(162.243,134.747) 8(130.683,120.84) 8(131.064,113.474) 8(131.064,114.871) 8(135.001,113.474) 8(136.368,120.87) 8(138.049,113.474) 8(138.049,114.871) 8(140.843,114.871)
  round 1.524 hole 0.5: 0(120.65,162.179)
  round 0.6 hole 0.3: 2(76.2,148.59) 2(76.708,151.13) 2(78.359,141.859) 2(82.677,131.699) 2(83.185,140.462) 2(83.185,141.859) 2(85.598,148.209) 2(85.598,154.876) 2(85.598,159.639) 2(89.154,167.386) 2(89.154,172.466) 2(98.044,142.113) 2(98.933,140.081) 2(99.568,141.986) 2(100.457,130.302) 2(101.854,134.556) 2(103.632,139.51) 2(103.759,130.302) 2(103.759,131.699) 2(103.759,136.017)
  round 1 hole 0.3: 2(76.962,154.305) 2(81.026,167.386) 2(81.28,173.101) 2(94.107,157.099) 2(97.663,158.496) 2(101.219,170.688) 2(103.505,157.988) 2(108.458,165.1) 2(111.76,159.385) 2(111.76,161.036) 2(120.777,156.718)
  round 1.5 hole 0.6: 2(76.962,159.893) 2(85.217,137.795) 2(85.598,124.333) 2(88.519,137.795) 2(89.154,124.333)
  round 1.5 hole 0.5: 2(97.917,169.672) 2(133.731,155.321) 2(133.731,172.72) 2(160.274,157.226) 2(164.719,157.226) 2(168.148,147.955)
  round 1 hole 1: 9(104.14,166.37) 9(104.902,173.863)
  round 2 hole 2: 9(131.318,125.095) 9(133.985,122.682) 9(136.525,125.222)

## Via types
v1: diameter 0.7, hole 0.3, Top Layer to Bottom Layer, 23 vias
v2: diameter 0.8, hole 0.3, Top Layer to Bottom Layer, 13 vias
v3: diameter 1, hole 0.3, Top Layer to Bottom Layer, 2 vias

## Nets (pads, with @x,y where several pads share a name; then routed paths per layer and width w, separated by ;. In a path a pad name is that pad's centre, name@x,y a point inside that pad or via, vN(x,y) a via of type N, cw(c..) or ccw(c..) an arc to the next point about the centre after c; other vN are vias at no path point)
ADC_INT: STM32F405RG.57 U2.2 | length 44.2
  Top Layer w0.256: U2.2@98.224,137.545 100.199,137.545 v1(100.711,137.033)
  Top Layer w0.3: STM32F405RG.57@133.735,129.298 133.735,131.195 v1(135.636,133.096)
  Bottom Layer w0.256: v1(100.711,137.033) 117.221,137.033 120.015,134.239 135.128,134.239 135.636,133.731 v1(135.636,133.096)
ADCIN: C5.1 R22.1 U2.14 U3.4 | length 15
  Top Layer w0.256: U2.14@96.524,136.345 96.524,135.259 96.012,134.747 96.012,133.223 96.59,132.645 U3.4@96.59,131.842 ; R22.1@98.6,131.842 R22.1@98.679,131.762 99.568,130.874 99.568,129.032 100.139,128.46 C5.1@100.139,124.46
  Top Layer w0.3: U3.4@96.59,131.842 R22.1@98.6,131.842
AGND: C1.1 C2.2 C4.1 C5.2 pad.1@97.028,124.523 pad.1@97.028,126.682 pad.1@98.679,124.523 pad.2@80.137,128.143 pad.2@80.137,130.81 pad.2@80.645,139.573 pad.2@82.677,131.699 pad.2@83.185,140.462 pad.2@85.217,137.795 pad.2@85.598,124.333 pad.2@87.63,130.81 pad.2@88.519,137.795 pad.2@89.154,124.333 pad.2@92.075,129.54 pad.2@97.79,128.778 pad.2@100.457,130.302 R1.2 R2.1 R3.2 R6.2 R7.1 U1.5 U2.8 U3.2 | length 28.8
  Top Layer w0.256: U3.2@95.94,129.902 95.94,128.088 96.965,127.063 C4.1@96.965,124.46 C5.2@98.742,124.46
  Top Layer w0.3: 87.503,137.795 87.57,137.728 U1.5@87.57,133.985 ; R1.2@88.519,137.795 88.519,138.684 90.551,140.716 95.758,140.716 96.024,140.45 U2.8@96.024,139.245
  Top Layer w0.8: R3.2@83.185,140.398 83.185,139.827 R6.2@85.217,137.795 87.503,137.795 R1.2@88.519,137.795
AVDD_ADC: C2.1 Header2*3.3 U2.15 | length 24
  Top Layer w0.256: U2.15@97.024,136.345 97.024,135.005 v2(98.171,133.858) C2.1@100.457,131.762
  Bottom Layer w0.256: Header2*3.3@94.869,149.733 96.286,148.316 96.286,134.6 97.028,133.858 v2(98.171,133.858)
BOOT1: STM32F405RG.28
CAN1_RX: STM32F405RG.44 U4.4 | length 29.4
  Top Layer w0.3: STM32F405RG.44@139.585,125.448 153.515,125.448 158.369,130.302 161.798,130.302 163.449,131.953 U4.4@163.449,134.747
CAN1_TX: STM32F405RG.45 U4.1 | length 23.7
  Top Layer w0.3: STM32F405RG.45@139.585,125.948 150.84,125.948 U4.1@159.639,134.747
CAN2_RX: STM32F405RG.33 U5.4 | length 28.2
  Top Layer w0.3: STM32F405RG.33@139.585,119.948 143.836,115.697 161.798,115.697 163.195,117.094 U5.4@163.195,119.38
CAN2_TX: STM32F405RG.34 U5.1 | length 20.2
  Top Layer w0.3: STM32F405RG.34@139.585,120.448 158.317,120.448 U5.1@159.385,119.38
CH1: P5.3 U1.3 U2.12 | length 43.1
  Top Layer w0.256: v2(94.742,136.271) 95.324,136.853 U2.12@95.324,137.045
  Top Layer w0.3: P5.3@77.343,129.794 76.073,131.064 76.073,135.382 76.962,136.271 78.486,136.271 82.423,132.334 88.011,132.334 88.87,133.193 U1.3@88.87,133.985
  Bottom Layer w0.256: P5.3@77.343,129.794 83.757,136.208 v2@94.679,136.208
CH2: P5.4 U1.14 U2.11 | length 28.1
  Top Layer w0.256: U1.14@88.87,127.585 88.87,128.875 93.853,133.858 93.853,136.404 U2.11@94.993,137.544
  Top Layer w0.3: P5.4@77.343,132.334 83.82,125.857 88.265,125.857 88.87,126.462 U1.14@88.87,127.585
CH3: P5.5 U1.11 U2.10 | length 27.3
  Top Layer w0.256: U1.11@86.92,127.585 U1.11@86.92,127.814 ; 86.92,129.107 88.213,129.107 92.964,133.858 92.964,136.771 94.238,138.045 U2.10@95.324,138.045
  Top Layer w0.3: P5.5@77.343,134.874 81.28,130.937 85.09,130.937 86.92,129.107 U1.11@86.92,127.814
CH4: P5.6 U1.6 U2.9 | length 32.2
  Top Layer w0.3: P5.6@77.343,137.414 79.121,137.414 83.693,132.842 86.487,132.842 86.92,133.275 U1.6@86.92,133.985 ; v2(93.345,139.7) 94.89,139.7 95.324,139.266 U2.9@95.324,138.545
  Bottom Layer w0.3: P5.6@77.343,137.414 83.185,137.414 85.471,139.7 v2(93.345,139.7)
DGND: C3.2 C26.2 C27.2 C28.1 C29.1 C30.1 C31.1 C32.1 C33.2 C34.2 C35.2 C36.2 C37.2 C38.1 C39.1 C40.1 C41.1 D2.1 D4.1 JTAG.4 JTAG.6 JTAG.8 JTAG.10 JTAG.12 JTAG.14 JTAG.16 JTAG.18 JTAG.20 P1.1 P1.2 pad.1@81.407,105.346 pad.1@81.407,117.538 pad.1@85.09,114.745 pad.1@86.741,110.172 pad.1@112.903,98.742 pad.2@76.835,93.345 pad.2@76.835,96.52 pad.2@77.47,121.285 pad.2@78.74,112.395 pad.2@80.645,93.218 pad.2@81.915,120.65 pad.2@84.455,90.043 pad.2@84.455,93.218 pad.2@91.44,97.155 pad.2@91.44,100.33 pad.2@93.98,105.283 pad.2@93.98,109.22 pad.2@93.98,112.395 pad.2@93.98,117.348 pad.2@97.79,97.028 pad.2@97.79,105.283 pad.2@97.663,88.773 pad.2@98.933,140.081 pad.2@99.568,141.986 pad.2@101.6,105.41 pad.2@102.235,122.174 pad.2@102.235,132.715 pad.2@103.505,97.028 pad.2@103.505,117.348 pad.2@103.759,130.302 pad.2@105.41,107.188 pad.2@105.41,138.43 pad.2@109.093,117.348 pad.2@109.855,144.78 pad.2@109.855,147.955 pad.2@110.49,138.43 pad.2@110.363,97.155 pad.2@110.617,106.172 pad.2@111.76,109.093 pad.2@111.76,111.76 pad.2@111.76,117.475 pad.2@114.3,102.235 pad.2@114.3,117.475 pad.2@114.427,106.045 pad.2@114.554,111.76 pad.2@115.57,97.155 pad.2@116.205,144.78 pad.2@116.205,147.955 pad.2@117.983,106.045 pad.2@118.11,102.235 pad.2@120.015,97.155 pad.2@121.285,102.235 pad.2@121.285,106.045 pad.2@121.285,111.76 pad.2@121.285,144.78 pad.2@121.285,147.955 pad.2@125.73,144.78 pad.2@125.73,147.955 pad.2@125.095,97.155 pad.2@130.175,105.41 pad.2@130.175,144.78 pad.2@130.175,147.955 pad.2@133.35,105.41 pad.2@133.985,97.155 pad.2@137.795,105.283 pad.2@140.335,100.965 pad.2@142.24,105.41 pad.2@144.78,117.983 pad.2@144.78,121.92 pad.2@144.145,133.858 pad.2@146.05,105.41 pad.2@146.05,109.22 pad.2@146.05,112.395 pad.2@147.32,88.9 pad.2@147.32,96.393 pad.2@147.193,92.71 pad.2@148.59,117.983 pad.2@148.59,121.92 pad.2@149.86,130.683 pad.2@149.86,135.255 pad.2@149.86,139.827 pad.2@149.86,144.653 pad.2@149.225,109.22 pad.2@149.225,112.395 pad.2@153.67,130.683 pad.2@154.178,139.7 pad.2@154.305,89.408 pad.2@154.305,93.345 pad.2@154.305,97.155 pad.2@154.305,100.965 pad.2@154.305,105.41 pad.2@154.305,109.347 pad.2@154.305,118.11 pad.2@154.305,121.92 pad.2@154.305,144.78 pad.2@154.432,113.03 pad.2@158.75,144.78 pad.2@160.655,89.535 pad.2@160.655,93.218 pad.2@160.655,97.155 pad.2@160.655,100.965 pad.2@160.655,105.283 pad.2@160.655,109.22 pad.2@160.655,113.03 pad.5@85.598,102.362 pad.5@86.201,98.298 pad.5@88.614,88.265 pad.5@90.392,95.25 pad.5@111.968,132.052 pad.5@113.506,135.989 pad.5@122.509,128.772 pad.5@131.921,97.282 pad.6@131.508,136.271 pad.6@133.286,136.271 pad.6@147.13,127.762 pad.6@147.13,129.413 pad.6@159.321,125.095 pad.6@159.702,140.462 pad.6@159.957,117.094 pad.6@160.338,131.953 pad.6@160.591,119.38 pad.6@160.972,134.747 pad.8@130.683,120.84 pad.8@131.064,113.474 pad.8@135.001,113.474 pad.8@138.049,113.474 Power.2 Q1.2 Q2.2 R11.1 R21.1 R38.2 R39.2 R43.2 RESET.2 STM32F405RG.12 STM32F405RG.18 STM32F405RG.63 U2.5 U2.6 U4.2 U4.8 U5.2 U5.8 UART1.1 | length 30.5
  Top Layer w0.256: C31.1@112,132.116 112.494,132.116 C32.1@113.919,133.541 ; C34.2@121.666,120.777 121.92,120.777 123.091,121.948 STM32F405RG.12@128.385,121.948 129.639,121.948 130.735,120.852 STM32F405RG.18@130.735,118.098 ; STM32F405RG.63@130.735,129.298 130.735,133.021 131.508,133.794 C28.1@131.508,136.271 R38.2@133.286,136.271 ; C37.2@147.13,127.762 C35.2@147.13,129.413 ; U5.8@159.385,124.885 U5.8@159.385,125.08
  Top Layer w0.8: 97.282,139.319 98.236,139.319 99.504,140.587 R39.2@99.504,142.113
  other v2: 100.584,92.583
DIGITAL_INPUT1: R8.1 STM32F405RG.15 | length 44.9
  Top Layer w0.256: v2(108.966,102.235) 108.966,102.362 127.052,120.448 STM32F405RG.15@128.385,120.448
  Bottom Layer w0.256: v2(91.186,102.362) 108.839,102.362 v2(108.966,102.235)
DIGITAL_INPUT2: R17.1 STM32F405RG.14 | length 40.1
  Top Layer w0.3: v2(111.76,114.173) 119.38,114.173 126.155,120.948 STM32F405RG.14@128.385,120.948
  Bottom Layer w0.3: v2(91.186,114.046) 91.313,114.173 v2(111.76,114.173)
DIO1: P5.1 R5.1 R9.1 | length 28.5
  Top Layer w0.3: R9.1@76.898,99.314 76.898,102.235 R5.1@76.772,102.362 76.073,103.06 76.073,106.045 80.01,109.982 80.01,122.047 P5.1@77.343,124.714
DIO2: P5.2 R15.1 R19.1 | length 18.1
  Top Layer w0.3: R19.1@76.708,110.109 76.708,113.792 R15.1@76.835,113.919 75.946,114.808 75.946,125.857 P5.2@77.343,127.254
EN1: STM32F405RG.8 U1.1 | length 42.6
  Top Layer w0.256: U1.1@90.17,133.985 v2(91.567,133.985) ; v1(119.126,123.698) 119.761,123.698 120.011,123.948 STM32F405RG.8@128.385,123.948
  Bottom Layer w0.256: v2(91.567,133.985) 95.885,133.985 106.172,123.698 v1(119.126,123.698)
EN2: STM32F405RG.9 U1.16 | length 40.5
  Top Layer w0.256: U1.16@90.17,127.585 v1(92.025,127.585) ; v1(116.967,122.809) 119.888,122.809 120.527,123.448 STM32F405RG.9@128.385,123.448
  Bottom Layer w0.256: v1(92.025,127.585) 92.068,127.628 100.591,127.628 105.41,122.809 v1(116.967,122.809)
EN3: STM32F405RG.10 U1.9 | length 47.2
  Top Layer w0.256: v1@84.759,127.585 U1.9@85.62,127.585 ; v1(115.316,121.92) 120.142,121.92 121.17,122.948 STM32F405RG.10@128.385,122.948
  Bottom Layer w0.256: v1(84.836,127.635) 90.17,127.635 92.075,125.73 101.092,125.73 104.902,121.92 v1(115.316,121.92)
EN4: STM32F405RG.11 U1.8 | length 60.9
  Top Layer w0.256: v1(84.328,133.985) U1.8@85.62,133.985 ; v1@112.649,120.904 120.142,120.904 121.686,122.448 STM32F405RG.11@128.385,122.448
  Bottom Layer w0.256: v1(84.328,133.985) 84.216,133.985 81.153,130.922 81.153,125.73 85.979,120.904 v1(112.776,120.904)